# Altium PCB Robo_Sumo_Definitive.PcbDoc
Units mm, origin at the board's own origin, x right, y up, seen from the top; angles counter-clockwise.
Board outline 96.52 x 96.52 mm, 2 copper layers (Top Layer, Bottom Layer); 42 components, 51 nets, 182 pads, 2 vias.
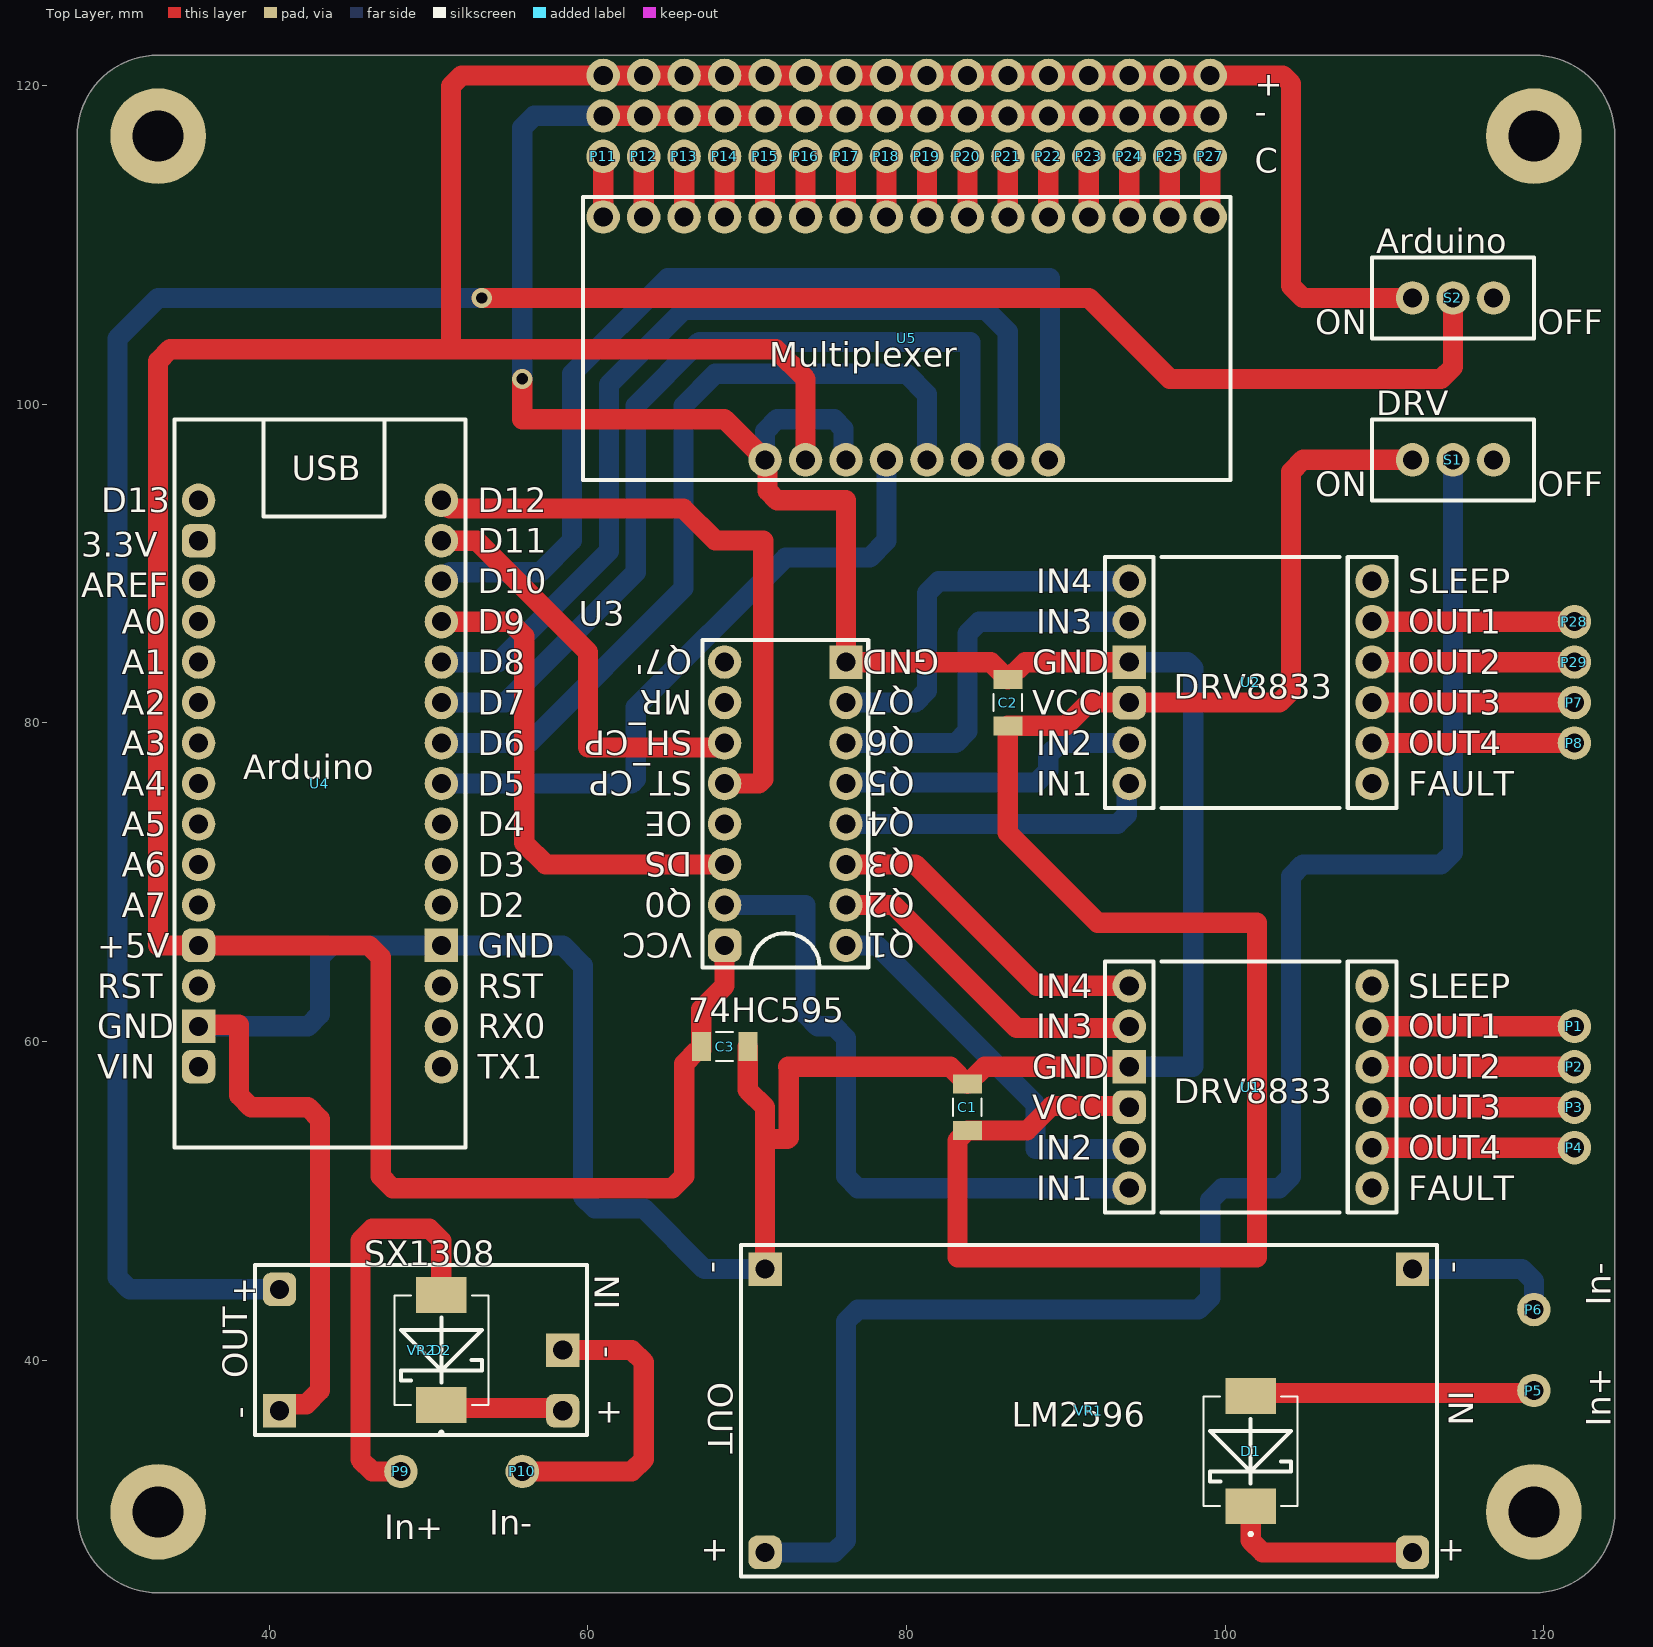
[diagram p0: Top Layer view]
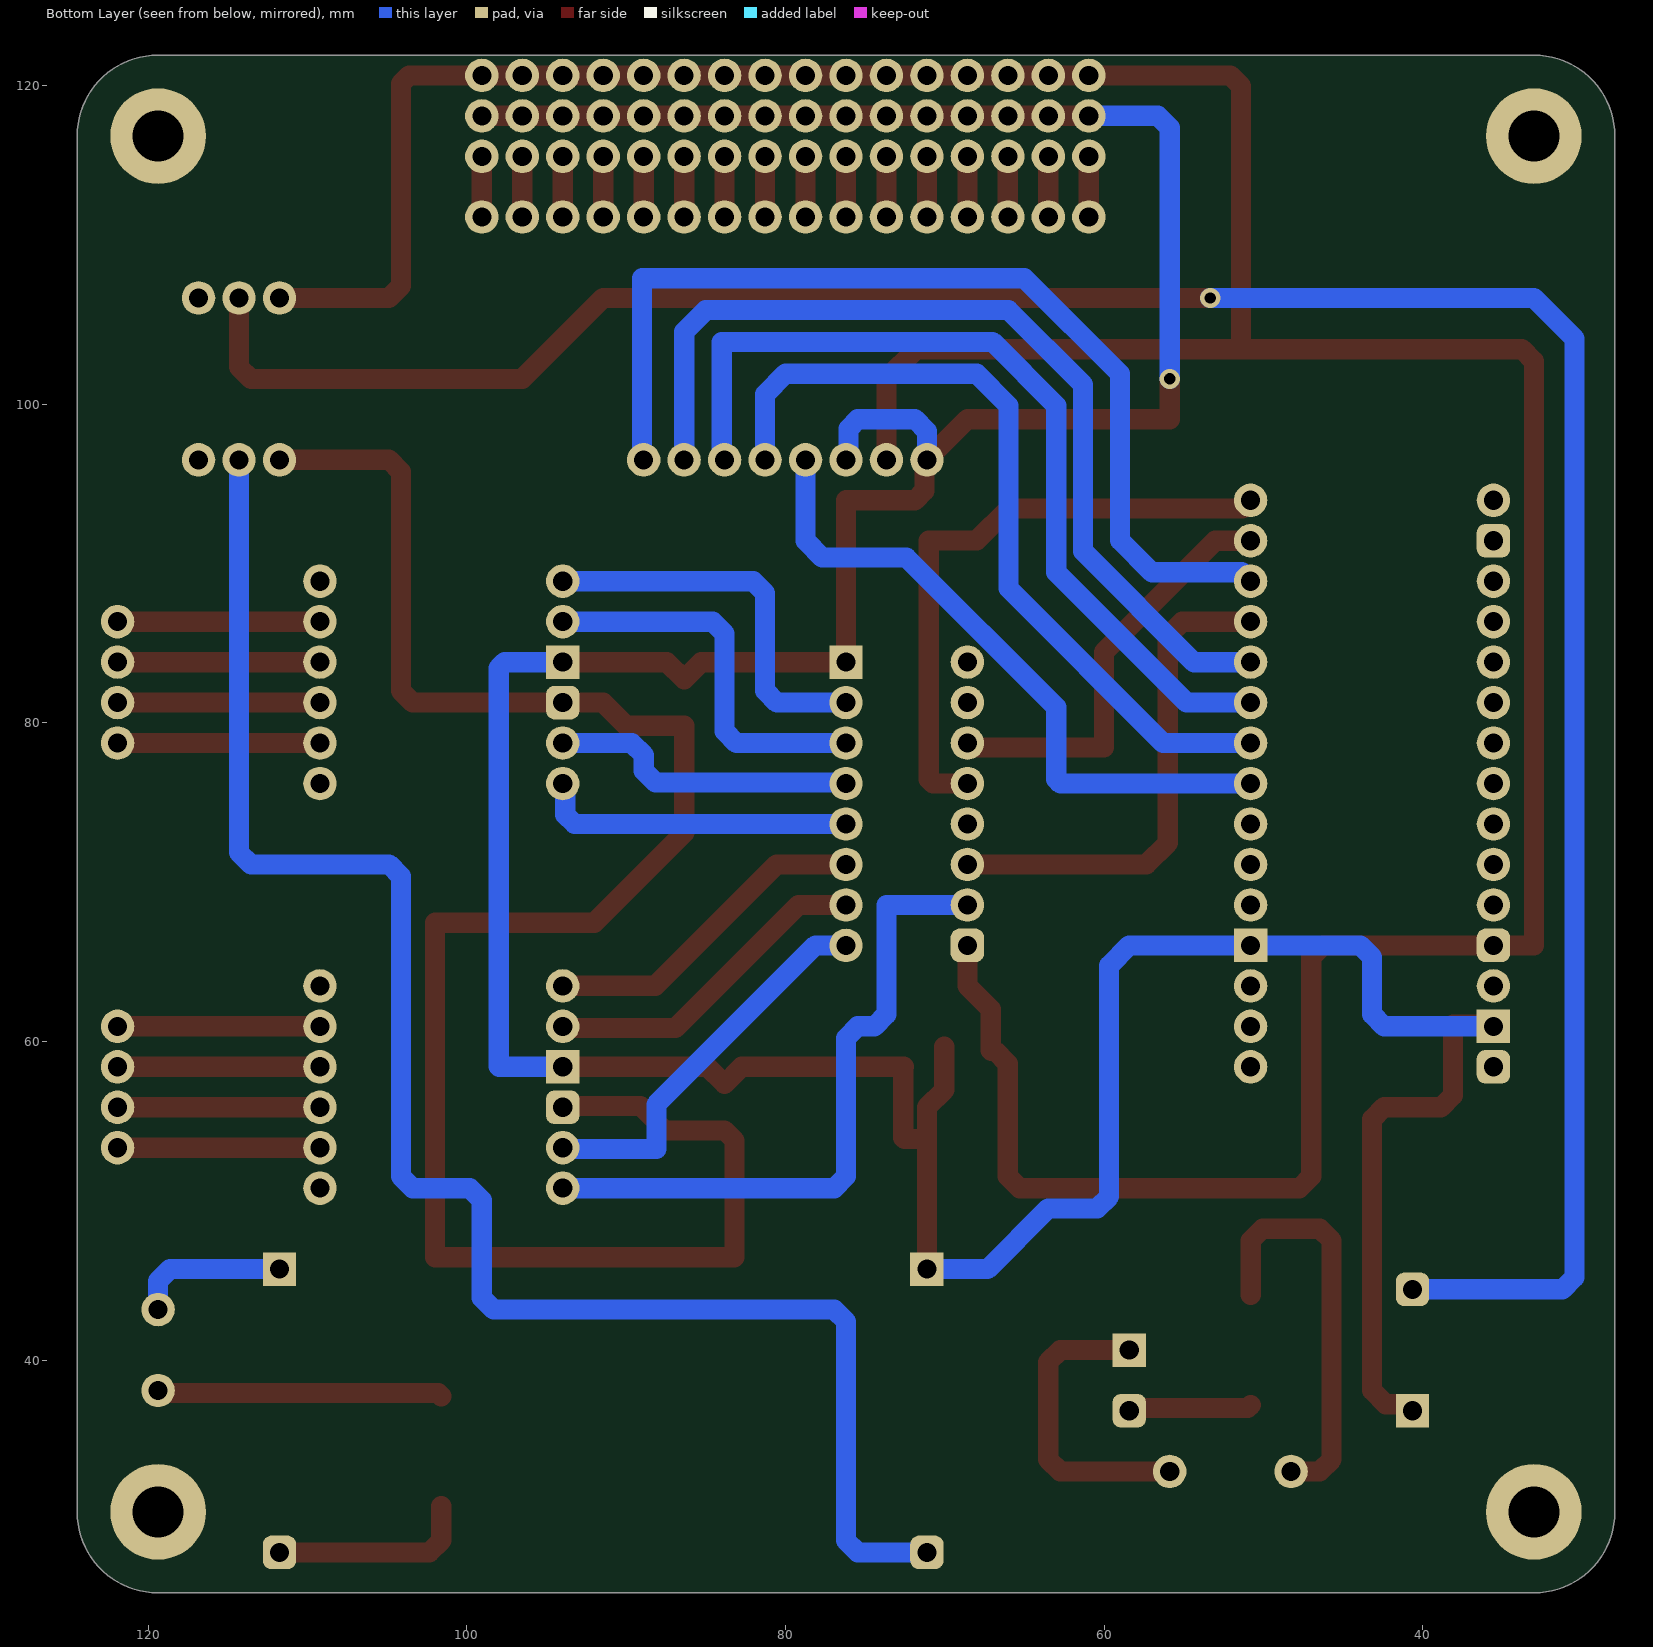
[diagram p1: Bottom Layer view, seen from below]

## Layer stack, top to bottom
Top Solder: solder mask 0.0102, Solder Resist, Dk 3.5
Top Layer: signal copper 0.0356
Dielectric 1: dielectric 0.32, FR-4, Dk 4.8
Bottom Layer: signal copper 0.0356
Bottom Solder: solder mask 0.0102, Solder Resist, Dk 3.5

## Board outline
27.94,30.48 ccw(c33.02,30.48) 33.02,25.4 119.38,25.4 ccw(c119.38,30.48) 124.46,30.48 124.46,116.84 ccw(c119.38,116.84) 119.38,121.92 33.02,121.92 ccw(c33.02,116.84) 27.94,116.84

## Design rules (kind name [scope] priority, off if disabled: settings)
AssemblyTestPointUsage [All] p1: isadvanced=TRUE
AssemblyTestpoint [All] p1: isadvanced=TRUE testpointundercomponent=TRUE minsize=1.016 maxsize=2.54 preferedsize=1.524 minholesize=0 maxholesize=1.016 preferedholesize=0.813 testpointgrid=0.025 usegrid=TRUE gridtolerance=0 allowsidetop=TRUE allowsidebottom=TRUE
Clearance Clearance_1 [OnMid vs OnMid] p1: gap=0.1 ignorepadtopadclearanceinfootprint=FALSE sourcerule=51 cellrowname=All cellrowtype=0 cellcolname=All cellcoltype=0 innerlayers=TRUE
Clearance Clearance_2 [(ExistsOnLayer('Top Layer') Or ExistsOnLayer('Bottom Layer')) vs (ExistsOnLayer('Top Layer') Or ExistsOnLayer('Bottom Layer'))] p2: gap=0.1 ignorepadtopadclearanceinfootprint=FALSE sourcerule=51 cellrowname=All cellrowtype=0 cellcolname=All cellcoltype=0 outerlayers=TRUE
Clearance [All] p3: gap=0.254 ignorepadtopadclearanceinfootprint=FALSE ismatrix=TRUE miname0="All Differential Pairs" mitype0=4
ComponentClearance [All] p1: isadvanced=TRUE gap=0 collisioncheckmode=3 verticalgap=0.254 showdistances=TRUE
FabricationTestPointUsage [All] p1: isadvanced=TRUE valid=0 allowmultiple=FALSE
FabricationTestpoint [All] p1: isadvanced=TRUE side=3 testpointundercomponent=TRUE minsize=1.016 maxsize=2.54 preferedsize=1.524 minholesize=0 maxholesize=1.016 preferedholesize=0.813 testpointgrid=0.025 allowsidetop=TRUE allowsidebottom=TRUE usegrid=TRUE gridtolerance=0
FanoutControl Fanout_BGA [IsBGA] p1: isadvanced=TRUE bgadir=Out bgaviamode=Centered fanoutstyle=Auto fanoutdirection=Alternating viagrid=0.025 // Fanout_BGA (Default Rule)
FanoutControl Fanout_LCC [IsLCC] p2: isadvanced=TRUE bgadir=Out bgaviamode=Centered fanoutstyle=Auto fanoutdirection=Alternating viagrid=0.025 // Fanout_LCC (Default Rule)
FanoutControl Fanout_SOIC [IsSOIC] p3: isadvanced=TRUE bgadir=Out bgaviamode=Centered fanoutstyle=Auto fanoutdirection=Alternating viagrid=0.025 // Fanout_SOIC (Default Rule)
FanoutControl Fanout_Small [(CompPinCount < 5)] p4: isadvanced=TRUE bgadir=Out bgaviamode=Centered fanoutstyle=Auto fanoutdirection=OutThenIn viagrid=0.025 // Fanout_Small (Default Rule)
FanoutControl Fanout_Default [All] p5: isadvanced=TRUE bgadir=Out bgaviamode=Centered fanoutstyle=Auto fanoutdirection=Alternating viagrid=0.025 // Fanout_Default (Default Rule)
Height [All] p1: isadvanced=TRUE minheight=0 maxheight=25.4 prefheight=12.7
HoleSize [All] p1: isadvanced=TRUE absolutevalues=TRUE maxlimit=2.54 minlimit=0.025 maxpercent=80.000 minpercent=20.000
HoleToHoleClearance [All] p1: isadvanced=TRUE gap=0 allowstackedmicrovias=TRUE
LayerPairs [All] p1: isadvanced=TRUE enforce=TRUE
MinimumSolderMaskSliver [All] p1: isadvanced=TRUE minsoldermaskwidth=0
NetAntennae [All] p1: isadvanced=TRUE netantennaetolerance=0
PasteMaskExpansion [All] p1: isadvanced=TRUE expansion=0
PlaneClearance [All] p1: isadvanced=TRUE clearance=0.508
PlaneConnect [All] p1: isadvanced=TRUE planeconnectstyle=Relief reliefexpansion=0.508 reliefentries=4 reliefconductorwidth=0.254 reliefairgap=0.254
PolygonConnect [All] p1: connectstyle=Relief reliefconductorwidth=0.254 reliefentries=4 polygonreliefangle="90 Angle" airgapwidth=0.254
RoutingCorners [All] p1: isadvanced=TRUE cornerstyle=45-Degree minsetback=2.54 maxsetback=2.54
RoutingPriority [All] p1: isadvanced=TRUE routingpriority=0
RoutingVias [All] p1: holewidth=0.711 width=1.27 viastyle="Through Hole" minholewidth=0.711 minwidth=1.27 maxholewidth=0.711 maxwidth=1.27
ShortCircuit [All] p1: isadvanced=TRUE allowed=FALSE
SilkToSilkClearance [All] p1: isadvanced=TRUE silktosilkclearance=0
SilkToSolderMaskClearance [IsPad] p1: isadvanced=TRUE minsilkscreentomaskgap=0.254 clearancetoexposedcopper=TRUE
SolderMaskExpansion [All] p1: isadvanced=TRUE expansion=0.102 istentingtop=FALSE
SupplyNets "Schematic Supply Nets_13" [InNet('Q6')] p1: isadvanced=TRUE voltage=0.000
SupplyNets "Schematic Supply Nets_12" [InNet('Q7')] p2: isadvanced=TRUE voltage=0.000
SupplyNets "Schematic Supply Nets_11" [InNet('ST_CP')] p3: isadvanced=TRUE voltage=0.000
SupplyNets "Schematic Supply Nets_10" [InNet('Q4')] p4: isadvanced=TRUE voltage=0.000
SupplyNets "Schematic Supply Nets_9" [InNet('Q2')] p5: isadvanced=TRUE voltage=0.000
SupplyNets "Schematic Supply Nets_8" [InNet('+5')] p6: isadvanced=TRUE voltage=0.000
SupplyNets "Schematic Supply Nets_7" [InNet('+3V')] p7: isadvanced=TRUE voltage=0.000
SupplyNets "Schematic Supply Nets_6" [InNet('Q1')] p8: isadvanced=TRUE voltage=0.000
SupplyNets "Schematic Supply Nets_5" [InNet('Q3')] p9: isadvanced=TRUE voltage=0.000
SupplyNets "Schematic Supply Nets_4" [InNet('GND')] p10: isadvanced=TRUE voltage=0.000
SupplyNets "Schematic Supply Nets_3" [InNet('DS')] p11: isadvanced=TRUE voltage=0.000
SupplyNets "Schematic Supply Nets_2" [InNet('Q5')] p12: isadvanced=TRUE voltage=0.000
SupplyNets "Schematic Supply Nets_1" [InNet('SH_CP')] p13: isadvanced=TRUE voltage=0.000
SupplyNets "Schematic Supply Nets" [InNet('Q0')] p14: isadvanced=TRUE voltage=0.000
UnRoutedNet [All] p1: isadvanced=TRUE
UnpouredPolygon [All] p1: isadvanced=TRUE
Width MaxMinWidth_1 [All] p1: isadvanced=TRUE maxlimit=1.27 minlimit=0.254 preferedwidth=1.27 minimp=50.000000 maximp=50.000000 favimp=50.000000
Width [All] p2 off: maxlimit=0.254 minlimit=0.254 preferedwidth=0.254
4 further rules are at their usual default settings.

## Components (designator, comment, footprint, x,y, rotation, side; value= is the part's Value field where it differs from the comment)
C1 "100nF" CAPC3216X180N 83.82,55.88 r270 top
C2 "100nF" CAPC3216X180N 86.36,81.28 r90 top
C3 "100nF" CAPC3216X180N 68.58,59.69 r180 top
D1 "SS34" DIOM7959X265N 101.6,34.29 r90 top
D2 "SS34" DIOM7959X265N 50.8,40.64 r90 top
P1 "Q0" PCB_Pin_1 121.92,60.96 r0 top
P2 "Q1" PCB_Pin_1 121.92,58.42 r0 top
P3 "Q2" PCB_Pin_1 121.92,55.88 r0 top
P4 "Q3" PCB_Pin_1 121.92,53.34 r0 top
P5 "+16V" PCB_Pin_1 119.38,38.1 r0 top
P6 "GND" PCB_Pin_1 119.38,43.18 r0 top
P7 "Q4" PCB_Pin_1 121.92,81.28 r0 top
P8 "Q5" PCB_Pin_1 121.92,78.74 r0 top
P9 "+4V" PCB_Pin_1 48.26,33.02 r90 top
P10 "GND" PCB_Pin_1 55.88,33.02 r90 top
P11 "" PCB_Pin_1 60.96,115.57 r0 top
P12 "" PCB_Pin_1 63.5,115.57 r0 top
P13 "" PCB_Pin_1 66.04,115.57 r0 top
P14 "" PCB_Pin_1 68.58,115.57 r0 top
P15 "" PCB_Pin_1 71.12,115.57 r0 top
P16 "" PCB_Pin_1 73.66,115.57 r0 top
P17 "" PCB_Pin_1 76.2,115.57 r0 top
P18 "" PCB_Pin_1 78.74,115.57 r0 top
P19 "" PCB_Pin_1 81.28,115.57 r0 top
P20 "" PCB_Pin_1 83.82,115.57 r0 top
P21 "" PCB_Pin_1 86.36,115.57 r0 top
P22 "" PCB_Pin_1 88.9,115.57 r0 top
P23 "" PCB_Pin_1 91.44,115.57 r0 top
P24 "" PCB_Pin_1 93.98,115.57 r0 top
P25 "" PCB_Pin_1 96.52,115.57 r0 top
P27 "" PCB_Pin_1 99.06,115.57 r0 top
P28 "PIN_1" PCB_Pin_1 121.92,86.36 r0 top
P29 "PIN_1" PCB_Pin_1 121.92,83.82 r0 top
S1 "Switch" Switcth 114.3,96.52 r0 top
S2 "Switch" Switcth 114.3,106.68 r0 top
U1 "DRV8833" PCB_DRV8833 91.44,48.26 r0 top
U2 "DRV8833" PCB_DRV8833 91.44,73.66 r0 top
U3 "74HC595" PCB_74HC595_Footprint 78.74,86.36 r180 top
U4 "ATMega328p" PCB_ATMega328p 33.02,55.88 r0 top
U5 "CD74HC4067M" CD74HC4067M 80.01,104.14 r270 top
VR1 "LM2596" "DC-DC Step-Down Footprint" 114.3,48.26 r180 top
VR2 "SX1308" "DC-DC Step-Up Footprint" 38.1,34.29 r0 top

## Footprints (in the part's own frame and the unit in brackets; to place one, negate y for a bottom-side part, rotate by r counter-clockwise, add the part's x,y. Pads: shape width x height; smd on the part's side, far side on the other; paste and mask are expansions set on the pad)
CAPC3216X180N [mm]
  rect 1.2x1.82 smd: 1(-1.46,0) 2(1.46,0)
  silkscreen extent -0.54,-0.9 0.54,0.9, body extent -1.6,-0.8 1.6,0.8, height 1.8
CD74HC4067M [mm]
  round 2.1 hole 1.2: 1(7.62,8.89) 2(-7.62,-1.27) 3(-7.62,-3.81) 4(-7.62,-6.35) 5(-7.62,-8.89) 6(-7.62,-11.43) 7(-7.62,-13.97) 8(-7.62,-16.51) 9(-7.62,-19.05) 10(7.62,-1.27) 11(7.62,1.27) 12(7.62,-8.89) 13(7.62,6.35) 14(7.62,3.81) 15(7.62,-3.81) 16(-7.62,19.05) 17(-7.62,16.51) 18(-7.62,13.97) 19(-7.62,11.43) 20(-7.62,8.89) 21(-7.62,6.35) 22(-7.62,3.81) 23(-7.62,1.27) 24(7.62,-6.35)
  silkscreen extent -8.89,-20.32 8.89,20.32
"DC-DC Step-Down Footprint" [mm]
  rect 2.1x2.1 hole 1.2: 0(2.54,2.54) 3(43.18,2.54)
  rrect50% 2.1x2.1 hole 1.2: 1(2.54,20.32) 2(43.18,20.32)
  silkscreen extent 1.02,1.02 44.7,21.84
"DC-DC Step-Up Footprint" [mm]
  rect 2.1x2.1 hole 1.2: 0(2.54,2.54) 2(20.32,6.35)
  rrect50% 2.1x2.1 hole 1.2: 1(2.54,10.16) 3(20.32,2.54)
  silkscreen extent 1.02,1.02 21.84,11.68
DIOM7959X265N [mm]
  rect 2.25x3.18 smd: A(3.455,0) C(-3.455,0)
  silkscreen extent -5.3,-2.95 3.44,2.95, body extent -3.98,-2.95 3.98,2.95, height 2.65
PCB_74HC595_Footprint [mm]
  rect 2.1x2.1 hole 1.2: 0(2.54,2.54)
  round 2.1 hole 1.2: 1(2.54,5.08) 2(2.54,7.62) 3(2.54,10.16) 4(2.54,12.7) 5(2.54,15.24) 6(2.54,17.78) 7(2.54,20.32) 9(10.16,17.78) 10(10.16,15.24) 11(10.16,12.7) 12(10.16,10.16) 13(10.16,7.62) 14(10.16,5.08) 15(10.16,2.54)
  rrect50% 2.1x2.1 hole 1.2: 8(10.16,20.32)
  silkscreen extent 1.14,1.14 11.56,21.72
PCB_ATMega328p [mm] "Arduino Nano"
  rrect50% 2.1x2.1 hole 1.2: 0(2.54,2.54) 3(2.54,10.16) 13(2.54,35.56)
  rect 2.1x2.1 hole 1.2: 1(2.54,5.08) 26(17.78,10.16)
  round 2.1 hole 1.2: 2(2.54,7.62) 4(2.54,12.7) 5(2.54,15.24) 6(2.54,17.78) 7(2.54,20.32) 8(2.54,22.86) 9(2.54,25.4) 10(2.54,27.94) 11(2.54,30.48) 12(2.54,33.02) 14(2.54,38.1) 15(17.78,38.1) 16(17.78,35.56) 17(17.78,33.02) 18(17.78,30.48) 19(17.78,27.94) 20(17.78,25.4) 21(17.78,22.86) 22(17.78,20.32) 23(17.78,17.78) 24(17.78,15.24) 25(17.78,12.7) 27(17.78,7.62) 28(17.78,5.08) 29(17.78,2.54)
  silkscreen extent 1.02,-2.54 19.3,43.18
PCB_DRV8833 [mm]
  round 2.1 hole 1.2: 0(2.54,2.54) 1(2.54,5.08) 4(2.54,12.7) 5(2.54,15.24) 6(17.78,15.24) 7(17.78,12.7) 8(17.78,10.16) 9(17.78,7.62) 10(17.78,5.08) 11(17.78,2.54)
  rrect50% 2.1x2.1 hole 1.2: 2(2.54,7.62)
  rect 2.1x2.1 hole 1.2: 3(2.54,10.16)
  silkscreen extent 1.02,1.02 19.3,16.76
PCB_Pin_1 [mm]
  round 2.1 hole 1.2: 0(0,0)
  body extent -1,-1 1,1, height 4.55
Switcth [mm]
  round 2.1 hole 1.2: 0(-2.54,0) 1(0,0) 2(2.54,0)
  silkscreen extent -5.08,-2.54 5.08,2.54

## Part data
C1 C2 C3: library part C_1206_100nF, "Ceramic capacitor SMD 1206 100 nF 50 V 10 % Samsung Electro-Mechanics CL31B104KBCNNNC 4000 pc(s)", Package="1206 Samsung", Availability="In Stock", Check_prices=https://www.snapeda.com/parts/CL31B104KBCNNNC/Samsung+Electro-Mechanics/view-part/?ref=eda, MF="Samsung Electro-Mechanics", MP=CL31B104KBCNNNC, Price=None, Purchase-URL=https://pricing.snapeda.com/search/part/CL31B104KBCNNNC/?ref=eda, SnapEDA_Link=https://www.snapeda.com/parts/CL31B104KBCNNNC/Samsung+Electro-Mechanics/view-part/?ref=snap
D1 D2: library part Diode_SS34, "SS34 - діод Шоттки", Package="SMC-2 ON Semiconductor", Check_prices=https://www.snapeda.com/parts/SS34/Onsemi/view-part/?ref=eda, MF=onsemi, MP=SS34, SnapEDA_Link=https://www.snapeda.com/parts/SS34/Onsemi/view-part/?ref=snap
P1 P2 P3 P4 P5 P6 P7 P8 P9 P10 P11 P12 P13 P14 P15 P16 P17 P18 P19 P20 P21 P22 P23 P24 P25 P27: library part PIN_1
U1 U2: library part "Motor Driver", "Драйвер крокового/колекторних двигунів DRV8833"
U3: library part SCS-16, "SN74HC595N - вихідний зсувний регістр 74HC595"
U4: library part "Arduino Nano", "DCCduino Nano CH340 - аналог Arduino Nano v3.0 TYPE C"
U5: "5-V, 16:1, 1-channel analog multiplexer", Package=None, Availability=Unavailable, MP=CD74HC4067M, Price=None
VR1: library part "DC-DC Step-Down", "DC-DC конвертер знижуючий 4.5...40В на 1.5...35В на LM2596"
VR2: library part "DC-DC Step-Up", "Mini DC-DC конвертер підвищує 2.5..10В 5В/8В/9В/12В на SX1308"

## Free pads (board coordinates)
  round 6 hole 3.2: 0(33.02,30.48) 1(33.02,116.84) 2(119.38,116.84) 3(119.38,30.48)
  round 2.1 hole 1.2: 0(60.96,118.11) 1(63.5,118.11) 2(66.04,118.11) 3(68.58,118.11) 4(71.12,118.11) 5(73.66,118.11) 6(76.2,118.11) 7(78.74,118.11) 8(81.28,118.11) 9(83.82,118.11) 10(86.36,118.11) 11(88.9,118.11) 12(91.44,118.11) 13(93.98,118.11) 14(96.52,118.11) 15(99.06,118.11) 16(60.96,120.65) 17(63.5,120.65) 18(66.04,120.65) 19(68.58,120.65) 20(71.12,120.65) 21(73.66,120.65) 22(76.2,120.65) 23(78.74,120.65) 24(81.28,120.65) 25(83.82,120.65) 26(86.36,120.65) 27(88.9,120.65) 28(91.44,120.65) 29(93.98,120.65) 30(96.52,120.65) 31(99.06,120.65)

## Via types
v1: diameter 1.27, hole 0.711, Top Layer to Bottom Layer, 2 vias

## Nets (pads, with @x,y where several pads share a name; then routed paths per layer and width w, separated by ;. In a path a pad name is that pad's centre, name@x,y a point inside that pad or via, vN(x,y) a via of type N, cw(c..) or ccw(c..) an arc to the next point about the centre after c; other vN are vias at no path point)
+3V: C1.2 C2.1 S1.0 U1.2 U2.2 | length 123.9
  Top Layer w1.27: U1.2 93.9,55.96 89.1,55.96 87.56,54.42 C1.2 83.2,53.8 83.2,46.46 102,46.46 102,67.46 92,67.46 86.36,73.1 C2.1 89.98,79.82 91.44,81.28 U2.2 103.396,81.28 104.14,82.024 104.14,95.776 104.884,96.52 S1.0
+5: C3.2 pad.16 pad.17 pad.18 pad.19 pad.20 pad.21 pad.22 pad.23 pad.24 pad.25 pad.26 pad.27 pad.28 pad.29 pad.30 pad.31 S2.0 U3.8 U4.3 U5.24 | length 237.2
  Top Layer w1.27: U3.8 68.58,63.5 67.12,62.04 C3.2 67.12,59.45 67.085,59.415 66.845,59.415 66.04,58.61 66.04,51.544 65.296,50.8 47.734,50.8 46.99,51.544 46.99,65.296 46.246,66.04 U4.3 33.02,66.04 33.02,102.716 33.764,103.46 51.4,103.46 ; U5.24 73.66,101.6 71.8,103.46 51.4,103.46 ; S2.0 104.884,106.68 104.14,107.424 104.14,120.124 103.614,120.65 pad.31 pad.30 pad.29 pad.28 pad.27 pad.26 pad.25 pad.24 pad.23 pad.22 pad.21 pad.20 pad.19 pad.18 pad.17 pad.16 52.07,120.65 51.4,119.98 51.4,103.46
DS: U3.10 U4.18 | length 31.7
  Top Layer w1.27: U4.18 55.1,86.36 56,85.46 56,72.46 57.34,71.12 U3.10
GND: C1.1 C2.2 C3.1 pad.0@60.96,118.11 pad.1@63.5,118.11 pad.2@66.04,118.11 pad.3@68.58,118.11 pad.4 pad.5 pad.6 pad.7 pad.8 pad.9 pad.10 pad.11 pad.12 pad.13 pad.14 pad.15 U1.3 U2.3 U3.0 U4.1 U4.26 U5.12 U5.15 VR1.3 VR2.0 | length 288.8
  Top Layer w1.27: U4.1 35.66,61.06 38.1,61.06 38.1,56.624 38.844,55.88 42.436,55.88 43.18,55.136 43.18,38.1 42.325,37.245 41.055,37.245 VR2.0 ; v1(55.88,101.6) 55.88,99.06 68.58,99.06 U5.12 71.279,96.361 71.279,94.565 71.864,93.98 76.2,93.98 U3.0 85.28,83.82 C2.2 87.44,83.82 U2.3 ; pad.0@60.96,118.11 63.5,118.11 66.04,118.11 68.58,118.11 pad.4 pad.5 pad.6 pad.7 pad.8 pad.9 pad.10 pad.11 pad.12 pad.13 pad.14 pad.15 ; C3.1 70.04,56.96 71.12,55.88 71.12,53.88 ; VR1.3 71.12,53.88 ; 72.58,58.42 82.74,58.42 C1.1 84.9,58.42 U1.3 ; 72.6,58.4 72.6,53.96 72.52,53.88 71.12,53.88
  Bottom Layer w1.27: U4.1 42.436,60.96 43.18,61.704 43.18,65.296 43.924,66.04 U4.26 58.42,66.04 59.69,64.77 59.69,50.274 60.434,49.53 63.5,49.53 67.31,45.72 VR1.3 ; v1(55.88,101.6) 55.88,117.366 56.624,118.11 pad.0@60.96,118.11 ; U5.12 71.12,98.316 71.864,99.06 75.456,99.06 76.041,98.475 76.041,96.679 U5.15 ; U1.3 97.96,58.42 98,58.46 98,83.46 97.64,83.82 U2.3
GND_4V: P10.0 VR2.2 | length 19.4
  Top Layer w1.27: P10.0 62.756,33.02 63.5,33.764 63.5,39.896 62.756,40.64 VR2.2
GND_16V: P6.0 VR1.0 | length 9.7
  Bottom Layer w1.27: VR1.0 118.636,45.72 119.38,44.976 P6.0
NetP1_0: P1.0 U1.7 | length 12.7
  Top Layer w1.27: U1.7 P1.0
NetP2_0: P2.0 U1.8 | length 12.7
  Top Layer w1.27: U1.8 P2.0
NetP3_0: P3.0 U1.9 | length 12.7
  Top Layer w1.27: U1.9 P3.0
NetP4_0: P4.0 U1.10 | length 12.7
  Top Layer w1.27: U1.10 P4.0
NetP7_0: P7.0 U2.9 | length 12.7
  Top Layer w1.27: U2.9 P7.0
NetP8_0: P8.0 U2.10 | length 12.7
  Top Layer w1.27: U2.10 P8.0
NetP11_0: P11.0 U5.9 | length 3.8
  Top Layer w1.27: U5.9 P11.0
NetP12_0: P12.0 U5.8 | length 3.8
  Top Layer w1.27: U5.8 P12.0
NetP13_0: P13.0 U5.7 | length 3.8
  Top Layer w1.27: U5.7 P13.0
NetP14_0: P14.0 U5.6 | length 3.8
  Top Layer w1.27: U5.6 P14.0
NetP15_0: P15.0 U5.5 | length 3.8
  Top Layer w1.27: U5.5 P15.0
NetP16_0: P16.0 U5.4 | length 3.8
  Top Layer w1.27: U5.4 P16.0
NetP17_0: P17.0 U5.3 | length 3.8
  Top Layer w1.27: U5.3 P17.0
NetP18_0: P18.0 U5.2 | length 4.1
  Top Layer w1.27: U5.2 P18.0 78.92,115.57 P18.0@79,115.65
NetP19_0: P19.0 U5.23 | length 3.8
  Top Layer w1.27: U5.23 P19.0
NetP20_0: P20.0 U5.22 | length 3.8
  Top Layer w1.27: U5.22 P20.0
NetP21_0: P21.0 U5.21 | length 3.8
  Top Layer w1.27: U5.21 P21.0
NetP22_0: P22.0 U5.20 | length 3.8
  Top Layer w1.27: U5.20 P22.0
NetP23_0: P23.0 U5.19 | length 3.8
  Top Layer w1.27: U5.19 P23.0
NetP24_0: P24.0 U5.18 | length 3.8
  Top Layer w1.27: U5.18 P24.0
NetP25_0: P25.0 U5.17 | length 3.8
  Top Layer w1.27: U5.17 P25.0
NetP27_0: P27.0 U5.16 | length 3.8
  Top Layer w1.27: U5.16 P27.0
NetP28_0: P28.0 U2.7 | length 12.7
  Top Layer w1.27: U2.7 P28.0
NetP29_0: P29.0 U2.8 | length 12.7
  Top Layer w1.27: U2.8 P29.0
NetS1_1: S1.1 VR1.2 | length 108.7
  Bottom Layer w1.27: VR1.2 75.456,27.94 76.2,28.684 76.2,42.436 76.944,43.18 98.316,43.18 99.06,43.924 99.06,50.056 99.804,50.8 103.396,50.8 104.14,51.544 104.14,70.376 104.884,71.12 113.556,71.12 114.3,71.864 S1.1
NetS2_1: S2.1 VR2.1 | length 161
  Top Layer w1.27: v1(53.34,106.68) 91.44,106.68 96.52,101.6 113.556,101.6 114.3,102.344 S2.1
  Bottom Layer w1.27: VR2.1 31.224,44.45 30.48,45.194 30.48,104.14 33.02,106.68 v1(53.34,106.68)
NetU4_17: U4.17 U5.1 | length 63.6
  Bottom Layer w1.27: U4.17 51.36,89.46 57,89.46 59,91.46 59,101.92 65,107.92 89,107.92 89,96.62 U5.1
NetU4_19: U4.19 U5.13 | length 59.4
  Bottom Layer w1.27: U4.19 54.36,83.82 61.32,90.78 61.32,101.24 66,105.92 85,105.92 86.36,104.56 U5.13
NetU4_20: U4.20 U5.14 | length 56.2
  Bottom Layer w1.27: U4.20 54.82,81.28 63,89.46 63,99.92 67,103.92 84,103.92 84,96.7 U5.14
NetU4_21: U4.21 U5.11 | length 51.4
  Bottom Layer w1.27: U4.21 56.28,78.74 66,88.46 66,99.92 68,101.92 80,101.92 81.28,100.64 U5.11
NetU4_22: U4.22 U5.10 | length 42.4
  Bottom Layer w1.27: U4.22 62.74,76.2 63,76.46 63,80.982 72.403,90.385 77.685,90.385 78.74,91.44 U5.10 78.57,96.35 U5.10@78.57,96.148
Q0: U1.0 U3.9 | length 41.9
  Bottom Layer w1.27: U3.9 73.66,68.58 73.66,61.704 74.404,60.96 75.456,60.96 76.2,60.216 76.2,51.544 76.944,50.8 U1.0
Q1: U1.1 U3.7 | length 24.7
  Bottom Layer w1.27: U3.7 78.12,66.04 88.1,56.06 88.1,53.26 93.9,53.26 U1.1
Q2: U1.4 U3.6 | length 21
  Top Layer w1.27: U3.6 79.18,68.58 86.9,60.86 93.88,60.86 U1.4
Q3: U1.5 U3.5 | length 20.9
  Top Layer w1.27: U3.5 80.54,71.12 88.16,63.5 U1.5
Q4: U2.0 U3.4 | length 19.9
  Bottom Layer w1.27: U3.4 93.236,73.66 93.821,74.245 93.821,76.041 U2.0
Q5: U2.1 U3.3 | length 19.4
  Bottom Layer w1.27: U3.3 76.26,76.26 88.156,76.26 88.9,77.004 88.9,77.996 89.644,78.74 U2.1
Q6: U2.4 U3.2 | length 24.5
  Bottom Layer w1.27: U3.2 83.076,78.74 83.82,79.484 83.82,85.616 84.564,86.36 U2.4
Q7: U2.5 U3.1 | length 24.5
  Bottom Layer w1.27: U3.1 80.536,81.28 81.28,82.024 81.28,88.156 82.024,88.9 U2.5
SH_CP: U3.13 U4.16 | length 26.8
  Top Layer w1.27: U4.16 53.02,91.44 60,84.46 60,78.46 68.3,78.46 U3.13
SS34_4V: D2.C VR2.3 | length 7.8
  Top Layer w1.27: D2.C 50.977,37.007 58.243,37.007 VR2.3
SS34_16V: D1.C VR1.1 | length 12.6
  Top Layer w1.27: D1.C 101.6,28.684 102.344,27.94 VR1.1
ST_CP: U3.12 U4.15 | length 38.8
  Top Layer w1.27: U4.15 51.32,93.46 66,93.46 68,91.46 71,91.46 71,76.46 70.74,76.2 U3.12
VCC_4V: D2.A P9.0 | length 25.7
  Top Layer w1.27: P9.0 46.464,33.02 45.72,33.764 45.72,47.516 46.464,48.26 50.056,48.26 50.8,47.516 D2.A
VCC_16V: D1.A P5.0 | length 17.9
  Top Layer w1.27: D1.A 101.796,37.941 119.221,37.941 P5.0
pads on no net: S1.2 S2.2 U1.6 U1.11 U2.6 U2.11 U3.11 U3.14 U3.15 U4.0 U4.2 U4.4 U4.5 U4.6 U4.7 U4.8 U4.9 U4.10 U4.11 U4.12 U4.13 U4.14 U4.23 U4.24 U4.25 U4.27 U4.28 U4.29

## Silkscreen, mask and mechanical layers (free items; w line width, h text height)
Top Overlay:
  text "+" at 101.854,119.38 h1.52
  text "-" at 101.854,117.602 h1.52
  text "C" at 101.854,114.554 h1.52
  text "ON" at 105.664,104.394 h1.52
  text "OFF" at 119.634,104.394 h1.52
  text "Multiplexer" at 71.374,102.362 h1.52
  text "ON" at 105.664,94.234 h1.52
  text "OFF" at 119.634,94.234 h1.52
  text "DRV8833" at 96.774,81.534 h1.52
  text "Arduino" at 38.354,76.454 h1.52
  text "74HC595" at 66.294,61.214 h1.52
  text "DRV8833" at 96.774,56.134 h1.52
  text "SX1308" at 45.974,45.974 h1.52
  text "In-" at 124.206,43.434 h1.52 r90
  text "LM2596" at 86.614,35.814 h1.52
  text "In+" at 124.206,35.814 h1.52 r90
  text "In-" at 53.794,29.034 h1.52
  text "In+" at 47.214,28.774 h1.52
Mechanical 1:
  lines w0.127: 27.94,30.48 ccw(c33.02,30.48) 33.02,25.4 119.38,25.4 ccw(c119.38,30.48) 124.46,30.48 124.46,116.84 ccw(c119.38,116.84) 119.38,121.92 33.02,121.92 ccw(c33.02,116.84) 27.94,116.84 27.94,30.48
  lines w0.254: 119.38,121.92 119.38,121.92

## Text inside footprints (layer, text, board x,y; h text height)
S1: Top Overlay "DRV" at 109.474,99.314 h1.52
S2: Top Overlay "Arduino" at 109.474,109.474 h1.52
U1: Top Overlay "FAULT" at 111.506,50.038 h1.52; Top Overlay "OUT4" at 111.506,52.578 h1.52; Top Overlay "OUT3" at 111.506,55.118 h1.52; Top Overlay "OUT2" at 111.506,57.658 h1.52; Top Overlay "SLEEP" at 111.506,62.738 h1.52; Top Overlay "IN4" at 88.138,62.738 h1.52; Top Overlay "IN3" at 88.138,60.198 h1.52; Top Overlay "GND" at 87.884,57.658 h1.52; Top Overlay "VCC" at 87.884,55.118 h1.52; Top Overlay "IN2" at 88.138,52.578 h1.52; Top Overlay "IN1" at 88.138,50.038 h1.52; Top Overlay "OUT1" at 111.506,60.198 h1.52
U2: Top Overlay "FAULT" at 111.506,75.438 h1.52; Top Overlay "OUT4" at 111.506,77.978 h1.52; Top Overlay "OUT3" at 111.506,80.518 h1.52; Top Overlay "OUT2" at 111.506,83.058 h1.52; Top Overlay "OUT1" at 111.506,85.598 h1.52; Top Overlay "SLEEP" at 111.506,88.138 h1.52; Top Overlay "IN4" at 88.138,88.138 h1.52; Top Overlay "IN3" at 88.138,85.598 h1.52; Top Overlay "GND" at 87.884,83.058 h1.52; Top Overlay "VCC" at 87.884,80.518 h1.52; Top Overlay "IN2" at 88.138,77.978 h1.52; Top Overlay "IN1" at 88.138,75.438 h1.52
U3: Top Overlay "Q1" at 80.518,66.802 h1.52 r180; Top Overlay "Q2" at 80.518,69.342 h1.52 r180; Top Overlay "Q3" at 80.518,71.882 h1.52 r180; Top Overlay "Q4" at 80.518,74.422 h1.52 r180; Top Overlay "Q5" at 80.518,76.962 h1.52 r180; Top Overlay "Q6" at 80.518,79.502 h1.52 r180; Top Overlay "Q7" at 80.518,82.042 h1.52 r180; Top Overlay "GND" at 82.042,84.582 h1.52 r180; Top Overlay "VCC" at 66.548,66.802 h1.52 r180; Top Overlay "Q0" at 66.548,69.342 h1.52 r180; Top Overlay "DS" at 66.548,71.882 h1.52 r180; Top Overlay "OE" at 66.548,74.422 h1.52 r180; Top Overlay "ST_CP" at 66.548,76.962 h1.52 r180; Top Overlay "SH_CP" at 66.548,79.502 h1.52 r180; Top Overlay "MR" at 66.548,82.042 h1.52 r180; Top Overlay "Q7'" at 66.548,84.582 h1.52 r180
U4: Top Overlay "D13" at 29.464,93.218 h1.52; Top Overlay "3.3V" at 28.194,90.424 h1.52; Top Overlay "AREF" at 28.194,87.884 h1.52; Top Overlay "A0" at 30.734,85.598 h1.52; Top Overlay "A1" at 30.734,83.058 h1.52; Top Overlay "A2" at 30.734,80.518 h1.52; Top Overlay "A3" at 30.734,77.978 h1.52; Top Overlay "A4" at 30.734,75.438 h1.52; Top Overlay "A5" at 30.734,72.898 h1.52; Top Overlay "A6" at 30.734,70.358 h1.52; Top Overlay "A7" at 30.734,67.818 h1.52; Top Overlay "+5V" at 29.21,65.278 h1.52; Top Overlay "RST" at 29.21,62.738 h1.52; Top Overlay "GND" at 29.21,60.198 h1.52; Top Overlay "VIN" at 29.21,57.658 h1.52; Top Overlay "D12" at 53.086,93.218 h1.52; Top Overlay "D11" at 53.086,90.678 h1.52; Top Overlay "D10" at 53.086,88.138 h1.52; Top Overlay "D9" at 53.086,85.598 h1.52; Top Overlay "D8" at 53.086,83.058 h1.52; Top Overlay "D7" at 53.086,80.518 h1.52; Top Overlay "D6" at 53.086,77.978 h1.52; Top Overlay "D5" at 53.086,75.438 h1.52; Top Overlay "D4" at 53.086,72.898 h1.52; Top Overlay "D3" at 53.086,70.358 h1.52; Top Overlay "D2" at 53.086,67.818 h1.52; Top Overlay "GND" at 53.086,65.278 h1.52; Top Overlay "RST" at 53.086,62.738 h1.52; Top Overlay "RX0" at 53.086,60.198 h1.52; Top Overlay "TX1" at 53.086,57.658 h1.52; Top Overlay "USB" at 41.402,95.25 h1.52
VR1: Top Overlay "+" at 115.062,28.702 h1.52 r180; Top Overlay "-" at 113.792,46.228 h1.52 r270; Top Overlay "-" at 67.31,46.228 h1.52 r270; Top Overlay "+" at 68.834,28.702 h1.52 r180; Top Overlay "IN" at 114.046,38.1 h1.52 r270; Top Overlay "OUT" at 67.564,38.608 h1.52 r270
VR2: Top Overlay "+" at 60.452,36.068 h1.52; Top Overlay "-" at 61.722,40.132 h1.52 r90; Top Overlay "IN" at 61.976,43.18 h1.52 r90; Top Overlay "-" at 38.862,36.322 h1.52 r90; Top Overlay "+" at 37.592,43.688 h1.52; Top Overlay "OUT" at 38.608,38.862 h1.52 r90